# EAGLE board MAPE-CUN-Large-018 (EAGLE 6.3)
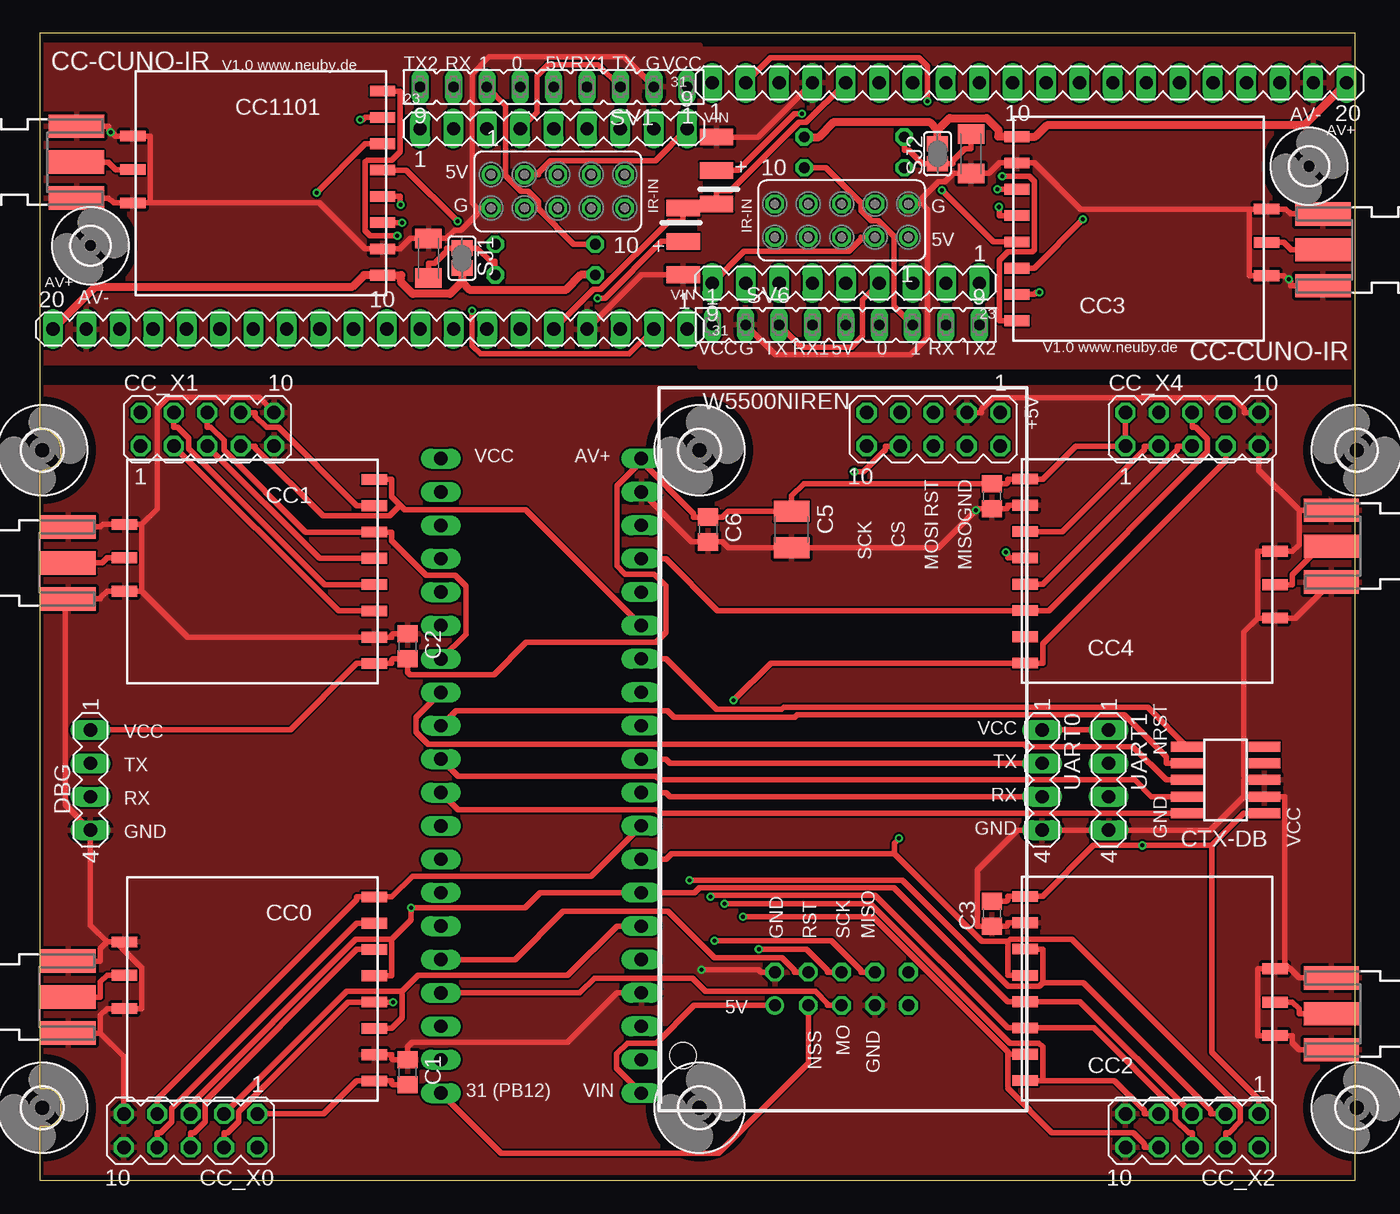
[diagram p0: board, top side]
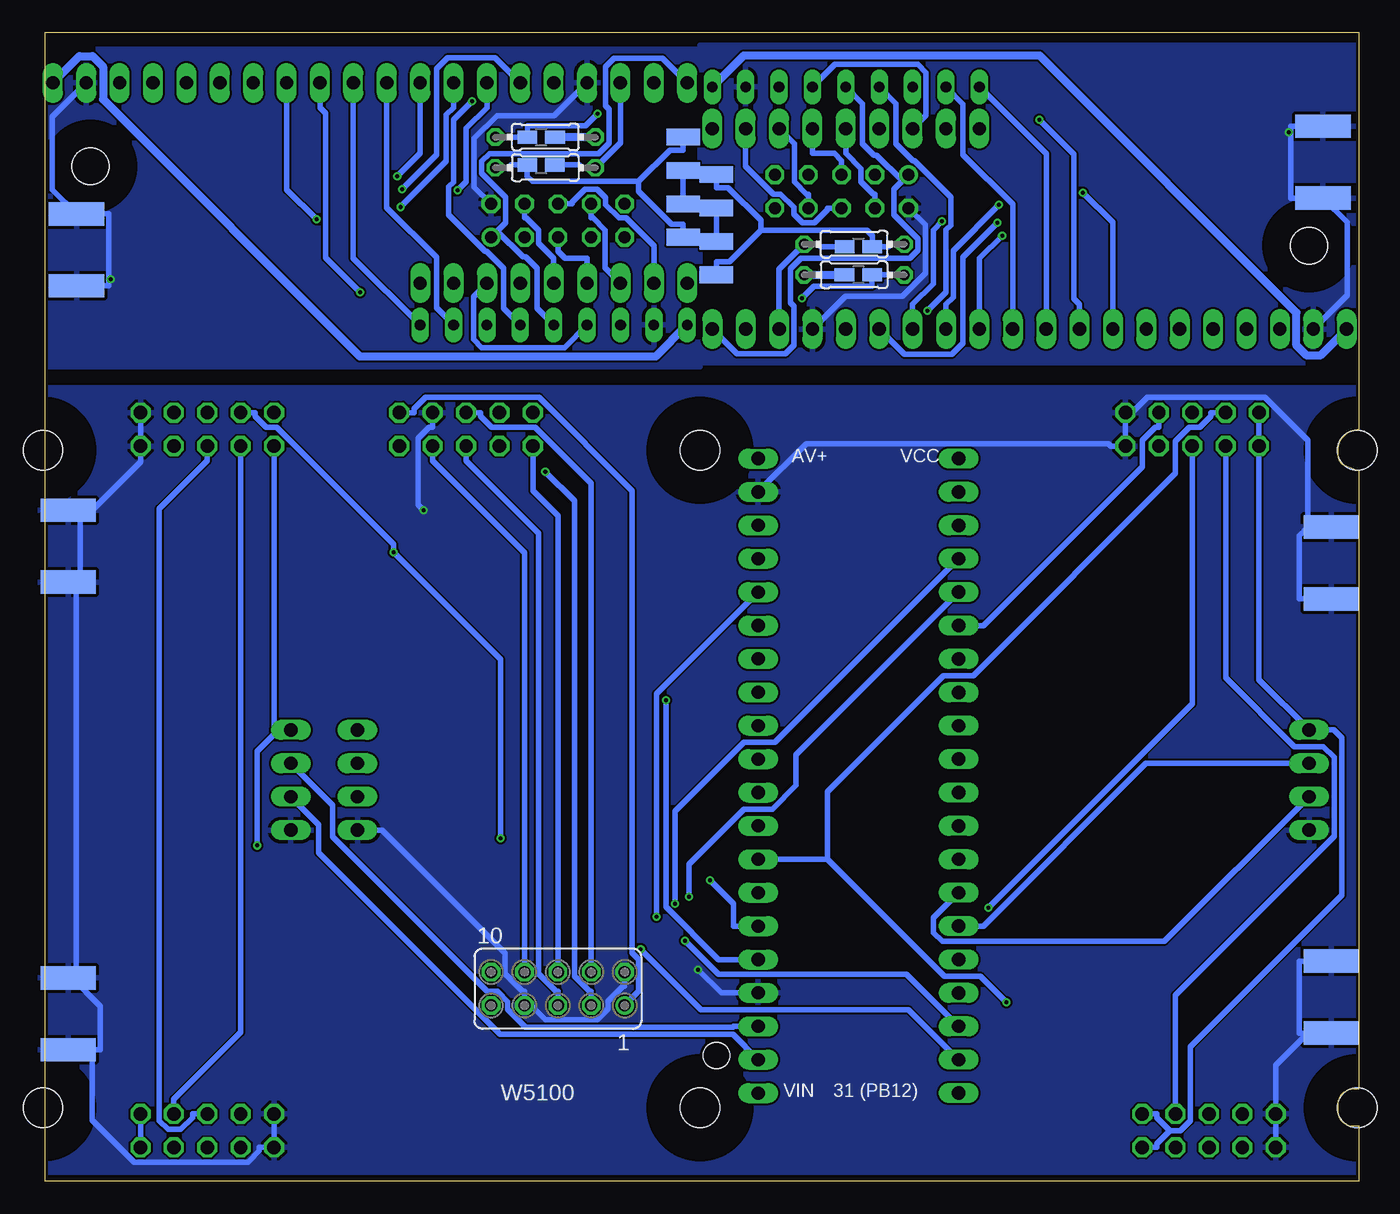
[diagram p1: board, bottom side, seen from below]

Size 100 x 87.3 mm. Coordinates in mm from the lower left corner, seen from the top.
Outline: 0,0 0,4.13 0.44,4.13 arc90 1.59,5.27 1.59,5.84 arc90 0.44,6.99 0,6.99 0,53.98 1.09,54.36 arc63 1.59,55.16 1.59,55.56 arc90 0,57.15 0,87.3 100,87.3 100,0 0,0
Copper layers (1*16): Top 0.035mm / dielectric 1.5mm / Bottom 0.035mm
Design rules "SeeedStudio_2layer_DRU_no_angle_20140221": minimum track width 6mil, minimum drill 12mil, track to track 6mil, track to pad 6mil, pad to pad 6mil, via to via 6mil, smd to smd 0mil, copper to edge 10mil, drill to drill 10mil, minimum pad ring 10mil, minimum via ring 6mil, stop-mask expansion 2mil, vias tented up to drill 100mil, thermal gap 10mil
Net classes: 0 default: width 0.406 mm; 1 PWR: width 0.305 mm
Holes 2 mm at 48.9,9.53

## Footprints (pad centres in the part's own frame; a part is rotated, then mirrored left to right if it is on the bottom)
C0805 = smd 1.3 x 1.5: 1 -0.95,0; 2 0.95,0
C1210 = smd 1.6 x 2.7: 1 -1.4,0; 2 1.4,0
C1206K = smd 1.5 x 2: 1 -1.5,0; 2 1.5,0
CC1101_MODULE1_SMD = smd 1.93 x 0.813: ANT 19,5.96; CSN 0,0; GDO0 0,2; GDO2 0,4; GND@0 0,12; GND@1 19,8.5; GND@2 19,3.42; MISO 0,6; MOSI 0,10; SCLK 0,8; VCC 0,14
MA05-2 = drill 1.016 octagon: 1 -5.08,-1.27; 2 -5.08,1.27; 3 -2.54,-1.27; 4 -2.54,1.27; 5 0,-1.27; 6 0,1.27; 7 2.54,-1.27; 8 2.54,1.27; 9 5.08,-1.27; 10 5.08,1.27
1365-10 = smd 0.76 x 2.4: 1 -2.54,-2.95; 2 -2.54,2.95; 3 -1.27,-2.95; 4 -1.27,2.95; 5 0,-2.95; 6 0,2.95; 7 1.27,-2.95; 8 1.27,2.95; 9 2.54,-2.95; 10 2.54,2.95
MA04-1 = drill 1.016 long: 1 -3.81,0; 2 -1.27,0; 3 1.27,0; 4 3.81,0
SMD1,27-2,54 = smd 1.27 x 2.54: 1 0,0
3,0 = hole 3: 0,0
2,8 = hole 2.8: 0,0
0204/7 = drill 0.813 octagon: 1 -3.81,0; 2 3.81,0
R0805W = smd 1.5 x 1: 1 -1.052,0; 2 1.052,0
SJ = smd 1.168 x 1.6: 1 -0.762,0; 2 0.762,0
FE09 = drill 0.813 long: 1 -10.16,0; 2 -7.62,0; 3 -5.08,0; 4 -2.54,0; 5 0,0; 6 2.54,0; 7 5.08,0; 8 7.62,0; 9 10.16,0
MA20-1 = drill 1.016 long: 1 -24.13,0; 2 -21.59,0; 3 -19.05,0; 4 -16.51,0; 5 -13.97,0; 6 -11.43,0; 7 -8.89,0; 8 -6.35,0; 9 -3.81,0; 10 -1.27,0; 11 1.27,0; 12 3.81,0; 13 6.35,0; 14 8.89,0; 15 11.43,0; 16 13.97,0; 17 16.51,0; 18 19.05,0; 19 21.59,0; 20 24.13,0
MA09-1 = drill 1.016 long: 1 -10.16,0; 2 -7.62,0; 3 -5.08,0; 4 -2.54,0; 5 0,0; 6 2.54,0; 7 5.08,0; 8 7.62,0; 9 10.16,0
20-DIP = drill 1.016 pad 1.27 long: 1 -24.13,-7.62; 2 -21.59,-7.62; 3 -19.05,-7.62; 4 -16.51,-7.62; 5 -13.97,-7.62; 6 -11.43,-7.62; 7 -8.89,-7.62; 8 -6.35,-7.62; 9 -3.81,-7.62; 10 -1.27,-7.62; 11 1.27,-7.62; 12 3.81,-7.62; 13 6.35,-7.62; 14 8.89,-7.62; 15 11.43,-7.62; 16 13.97,-7.62; 17 16.51,-7.62; 18 19.05,-7.62; 19 21.59,-7.62; 20 24.13,-7.62 | drill 1 pad 1.27 long: 21 24.13,7.62; 22 21.59,7.62; 23 19.05,7.62; 24 16.51,7.62; 25 13.97,7.62; 26 11.43,7.62; 27 8.89,7.62; 28 6.35,7.62; 29 3.81,7.62; 30 1.27,7.62; 31 -1.27,7.62; 32 -3.81,7.62; 33 -6.35,7.62; 34 -8.89,7.62; 35 -11.43,7.62; 36 -13.97,7.62; 37 -16.51,7.62; 38 -19.05,7.62; 39 -21.59,7.62; 40 -24.13,7.62
FE05-2 = drill 0.914: 1 -5.08,1.27 | drill 0.914 octagon: 2 -5.08,-1.27; 3 -2.54,1.27; 4 -2.54,-1.27; 5 0,1.27; 6 0,-1.27; 7 2.54,1.27; 8 2.54,-1.27; 9 5.08,1.27; 10 5.08,-1.27
SMA = smd 4.191 x 1.778: 1 2.115,0; GND@1 2.115,2.733; GND@2 2.115,-2.733 | smd 4.191 x 1.778 bottom: GND@3 2.115,2.733; GND@4 2.115,-2.733

## Placement (x,y rotation side)
C1  22pF  [C0805]  27.94,8.26 270 top
C2  22pF  [C0805]  27.94,40.64 270 top
C3  22pF  [C0805]  72.39,20.32 90 top
C4  22pF  [C0805]  72.39,52.07 90 top
C5  10uF  [C1210]  57.15,49.53 270 top
C6  22pF  [C0805]  50.8,49.53 270 top
C7  4,7uF  [C1206K]  29.53,70.17 90 top
C8  4,7uF  [C1206K]  70.8,78.11 270 top
CC0  CC1101_MODULE1SMD  [CC1101_MODULE1_SMD]  25.4,21.59 180 top
CC1  CC1101_MODULE1SMD  [CC1101_MODULE1_SMD]  25.4,53.34 180 top
CC2  CC1101_MODULE1SMD  [CC1101_MODULE1_SMD]  74.93,7.62 0 top
CC3  CC1101_MODULE1SMD  [CC1101_MODULE1_SMD]  74.3,65.41 0 top
CC4  CC1101_MODULE1SMD  [CC1101_MODULE1_SMD]  74.93,39.37 0 top
CC1101  CC1101_MODULE1SMD  [CC1101_MODULE1_SMD]  26.04,82.87 180 top
CC_X0  [MA05-2]  11.43,3.81 180 top
CC_X1  [MA05-2]  12.7,57.15 0 top
CC_X2  [MA05-2]  87.63,3.81 180 top
CC_X4  [MA05-2]  87.63,57.15 0 top
CTX-DB  1365-10  [1365-10]  90.17,30.48 90 top
DBG  [MA04-1]  3.81,30.48 270 top
GND  [SMD1,27-2,54]  48.9,68.9 90 top
GND1  [SMD1,27-2,54]  51.44,79.38 270 top
H1  MOUNT-HOLE3.0  [3,0]  100.14,5.55 0 top
H2  MOUNT-HOLE3.0  [3,0]  100.14,55.55 90 top
H3  MOUNT-HOLE3.0  [3,0]  0.14,5.55 0 top
H4  MOUNT-HOLE3.0  [3,0]  0.14,55.55 0 top
H5  MOUNT-HOLE3.0  [3,0]  50.14,5.55 0 top
H6  MOUNT-HOLE3.0  [3,0]  50.14,55.55 0 top
H7  MOUNT-HOLE2.8  [2,8]  3.81,71.12 0 top
H8  MOUNT-HOLE2.8  [2,8]  96.52,77.15 180 top
IR+  [SMD1,27-2,54]  48.9,71.44 90 top
IR+1  [SMD1,27-2,54]  51.44,76.83 270 top
IR-IN  [SMD1,27-2,54]  48.9,73.98 90 top
IR-IN1  [SMD1,27-2,54]  51.44,74.3 270 top
PC+  [SMD1,27-2,54]  48.9,76.52 90 bottom
PC+1  [SMD1,27-2,54]  51.44,71.75 270 bottom
PC-  [SMD1,27-2,54]  48.9,73.98 90 bottom
PC-1  [SMD1,27-2,54]  51.44,74.3 270 bottom
PWR+  [SMD1,27-2,54]  48.9,68.9 90 bottom
PWR+1  [SMD1,27-2,54]  51.44,79.38 270 bottom
PWR-  [SMD1,27-2,54]  48.9,71.44 90 bottom
PWR-1  [SMD1,27-2,54]  51.44,76.83 270 bottom
R1  100  [0204/7]  61.91,79.38 0 bottom
R2  100  [0204/7]  38.42,68.9 180 bottom
R3  100  [R0805W]  38.1,68.9 180 bottom
R4  100  [R0805W]  62.23,79.38 0 bottom
R5  220  [0204/7]  38.41,71.23 0 bottom
R6  220  [0204/7]  61.92,77.04 180 bottom
R7  220  [R0805W]  38.09,71.02 0 bottom
R8  220  [R0805W]  62.24,77.25 180 bottom
SJ1  [SJ]  32.07,70.17 270 top
SJ2  [SJ]  68.26,78.11 90 top
SV1  [FE09]  39.05,83.19 180 top
SV2  [MA20-1]  75.25,83.5 0 top
SV3  [MA09-1]  61.28,68.26 180 top
SV4  [MA20-1]  25.08,64.77 180 top
SV5  [MA09-1]  39.05,80.01 0 top
SV6  [FE09]  61.28,65.09 0 top
U$1  MAPLEMINI  [20-DIP]  38.1,30.8 270 top
UART0  [MA04-1]  76.2,30.48 270 top
UART1  [MA04-1]  81.28,30.48 270 top
W1  [FE05-2]  39.37,75.25 0 top
W2  [FE05-2]  60.96,73.03 180 top
W5100  [FE05-2]  60.96,14.61 180 bottom
W5500NIREN  [MA05-2]  67.94,57.15 180 top
X1  SMA  [SMA]  0,46.99 0 top
X2  SMA  [SMA]  0,13.97 0 top
X3  SMA  [SMA]  100.33,12.7 180 top
X4  SMA  [SMA]  100.33,48.26 180 top
X5  SMA  [SMA]  0.64,77.47 0 top
X6  SMA  [SMA]  99.69,70.8 180 top

## Library data of the parts
C1-C8 R1-R8 = rcl
CC0 CC1-CC4 CC1101 = wireless
CC_X0 CC_X1 CC_X2 CC_X4 DBG SV2-SV5 UART0 UART1 W5500NIREN = con-lstb; OC_FARNELL: unknown; OC_NEWARK: unknown
CTX-DB = con-leotronics; OC_FARNELL: unknown; OC_NEWARK: unknown
GND GND1 IR+ IR+1 IR-IN IR-IN1 PC+ PC+1 PC- PC-1 PWR+ PWR+1 PWR- PWR-1 = wirepad
H1-H8 = holes
SJ1 SJ2 = jumper
SV1 SV6 W1 W2 W5100 = con-lsta; OC_FARNELL: unknown; OC_NEWARK: unknown
U$1 = maplemini-small
X1-X6 = sma

## Nets
0-PB1: SV2.2 SV6.6
0-PB11: SV1.6 SV4.2
1: SV2.17
1-PB1: R6.1 R8.1 SV2.3 SV6.7
1-PB10: R5.1 R7.1 SV1.7 SV4.3
2: SV2.16
3: SV2.15
3-PB0: IR-IN.1 SV4.5
3-PB1: IR-IN1.1 SV2.5
12: SV4.15
13: SV4.16
14: SV4.17
+5V: U$1.21 W5100.1 W5500NIREN.1
+5V1: SV1.5 SV4.1 W1.1
+5V2: SV2.1 SV6.5 W2.1
CC_CS0: CC0.CSN CC_X0.7 U$1.29
CC_CS1: CC1.CSN CC_X1.7 U$1.35
CC_CS2: CC2.CSN CC_X2.7 U$1.4
CC_CS3: CC4.CSN CC_X4.7 U$1.25
CC_IN0: U$1.33
CC_IN_0: CC0.GDO2 CC_X0.6
CC_IN_1: CC1.GDO2 CC_X1.6 U$1.7
CC_IN_2: CC2.GDO2 CC_X2.6 U$1.5
CC_IN_3: CC4.GDO2 CC_X4.6 U$1.37
CC_IN_4: CC1101.GDO2 SV4.13
CC_IN_5: CC3.GDO2 SV2.13
CC_OUT0: U$1.32
CC_OUT_0: CC0.GDO0 CC_X0.8
CC_OUT_1: CC1.GDO0 CC_X1.8 U$1.6
CC_OUT_2: CC2.GDO0 CC_X2.8 U$1.36
CC_OUT_3: CC1101.GDO0 SV4.12
CC_OUT_4: CC3.GDO0 SV2.12
CSN: CC1101.CSN SV4.9
CSN1: CC3.CSN SV2.9
GND: C1.1 C2.1 C3.1 C4.1 C5.2 C6.2 CC0.GND@0 CC0.GND@1 CC0.GND@2 CC1.GND@0 CC1.GND@1 CC1.GND@2 CC2.GND@0 CC2.GND@1 CC2.GND@2 CC4.GND@0 CC4.GND@1 CC4.GND@2 CC_X0.9 CC_X0.10 CC_X1.9 CC_X1.10 CC_X2.9 CC_X2.10 CC_X4.9 CC_X4.10 CTX-DB.3 CTX-DB.5 DBG.4 U$1.24 U$1.39 UART0.4 UART1.4 W5100.2 W5100.7 W5500NIREN.3 X1.GND@1 X1.GND@2 X1.GND@3 X1.GND@4 X2.GND@1 X2.GND@2 X2.GND@3 X2.GND@4 X3.GND@1 X3.GND@2 X3.GND@3 X3.GND@4 X4.GND@1 X4.GND@2 X4.GND@3 X4.GND@4
GND1: C7.2 CC1101.GND@0 CC1101.GND@1 CC1101.GND@2 GND.1 SV1.2 SV4.4 SV4.19 W1.2 X5.GND@1 X5.GND@2 X5.GND@3 X5.GND@4
GND2: C8.2 CC3.GND@0 CC3.GND@1 CC3.GND@2 GND1.1 SV2.4 SV2.19 SV6.2 W2.2 X6.GND@1 X6.GND@2 X6.GND@3 X6.GND@4
IR+: C7.1 IR+.1 R2.1 R3.1 SJ1.1
IR+1: C8.1 IR+1.1 R1.1 R4.1 SJ2.1
MISO1: CC0.MISO CC1.MISO CC2.MISO CC4.MISO CC_X0.5 CC_X1.5 CC_X2.5 CC_X4.5 U$1.27
MISO2: U$1.18 W5100.8 W5500NIREN.4
MISO3: SV5.7 W1.8
MISO4: SV3.7 W2.8
MOSI: CC1101.MOSI SV4.6
MOSI1: CC0.MOSI CC1.MOSI CC2.MOSI CC4.MOSI CC_X0.3 CC_X1.3 CC_X2.3 CC_X4.3 U$1.26
MOSI2: SV5.6 W1.5
MOSI3: CC3.MOSI SV2.6
MOSI4: SV3.6 W2.5
N$1: CC2.ANT X3.1
N$2: CC4.ANT X4.1
N$3: CC1.ANT X1.1
N$4: CC0.ANT X2.1
N$5: CC1101.ANT X5.1
N$6: CC1101.MISO SV4.7
N$7: CC1101.SCLK SV4.8
N$8: CTX-DB.7
N$9: CC3.ANT X6.1
N$10: CC3.MISO SV2.7
N$11: CC3.SCLK SV2.8
NC: CTX-DB.9
NRESET: CTX-DB.10 U$1.34
PWR+: PC+.1 PWR+.1 R5.2 R7.2
PWR+1: PC+1.1 PWR+1.1 R6.2 R8.2
PWR-: PC-.1 PWR-.1
PWR-1: PC-1.1 PWR-1.1
RST: U$1.17 W5100.5 W5500NIREN.6
RX0: U$1.30 UART0.3
RX1: U$1.22 UART1.3
RX2: SV1.4 SV5.3
RX3: SV3.3 SV6.4
RX_DBG: DBG.3 U$1.14
S2RX: SV1.8 SV4.10
S2RX1: SV2.10 SV6.8
S2TX: SV1.9 SV4.11
S2TX1: SV2.11 SV6.9
SCK1: CC0.SCLK CC1.SCLK CC2.SCLK CC4.SCLK CC_X0.4 CC_X1.4 CC_X2.4 CC_X4.4 U$1.28
SCK2: U$1.19 W5100.6 W5500NIREN.10
SCK3: SV5.8 W1.6
SCK4: SV3.8 W2.6
SWCLK/TCK: CTX-DB.4 U$1.10
SWDIO/TMS: CTX-DB.2 U$1.11
SWO/TDO: CTX-DB.6 U$1.8
TDI: CTX-DB.8 U$1.9
TX0: U$1.31 UART0.2
TX1: U$1.23 UART1.2
TX2: SV1.3 SV5.4
TX3: SV3.4 SV6.3
TX_DBG: DBG.2 U$1.15
USB-DM: SV5.1
USB-DM1: SV3.1
USB-DP: SV5.2
USB-DP1: SV3.2
VCC: C1.2 C2.2 C3.2 C4.2 C5.1 C6.1 CC0.VCC CC1.VCC CC2.VCC CC4.VCC CC_X0.1 CC_X0.2 CC_X1.1 CC_X1.2 CC_X2.1 CC_X2.2 CC_X4.1 CC_X4.2 CTX-DB.1 DBG.1 U$1.40 UART0.1 UART1.1
VCC1 [PWR]: CC1101.VCC R2.2 R3.2 SJ1.2 SV1.1 SV4.20
VCC2 [PWR]: CC3.VCC R1.2 R4.2 SJ2.2 SV2.20 SV6.1
WIZ_CS: U$1.20 W5100.3 W5500NIREN.8
WIZ_CS1: SV5.9 W1.3
WIZ_CS2: SV3.9 W2.3
WIZ_RST: U$1.16 W5100.4 W5500NIREN.5
WIZ_RST1: SV5.5 W1.4
WIZ_RST2: SV3.5 W2.4

## Tracks (layer width: path | path; a pad name or v marks a point on that pad's centre or on a via)
0-PB1  (via drill 0.3 pad 0.61)
  Top 0.406: SV2.2 55.55,85.39 66.85,85.39 67.47,84.76 v67.47,82.1
  Bottom 0.406: SV6.6 65.09,66.36 65.09,69.4 66.37,70.69 66.49,70.69 69.26,73.46 69.26,75.59 68.9,75.95 68.9,80.68 v67.47,82.1
0-PB11  (via drill 0.3 pad 0.61)
  Top 0.406: SV4.2 44.78,62.88 33.48,62.88 32.85,63.51 v32.85,66.17
  Bottom 0.406: SV1.6 35.24,81.92 35.24,78.87 33.96,77.58 33.84,77.58 31.07,74.81 31.07,72.69 31.43,72.33 31.43,67.59 v32.85,66.17
1-PB1
  Top 0.406: R6.1 59.75,77.04 62.43,74.36 62.43,73.82 63.23,73.03 63.75,73.03 64.94,71.84 64.94,66.51 SV6.7
  Bottom 0.406: R8.1 59.33,77.25 59.12,77.04 R6.1 56.2,78.95 SV2.3
1-PB10
  Top 0.406: R5.1 40.58,71.23 37.9,73.91 37.9,74.45 37.1,75.25 36.58,75.25 35.4,76.43 35.4,81.76 SV1.7
  Bottom 0.406: R7.1 41,71.02 41.21,71.23 R5.1 44.13,69.32 SV4.3
3-PB0
  Top 0.406: SV4.5 42.07,67.78 42.63,67.78 47.83,72.99 48.9,72.99 IR-IN.1
3-PB1
  Top 0.406: SV2.5 58.26,80.49 57.7,80.49 52.5,75.29 51.44,75.29 IR-IN1.1
+5V
  Top 0.406: W5100.1 49.72,13.34 46.86,10.48 44.65,10.48 43.83,9.65 43.83,8.56 U$1.21
  Bottom 0.406: W5100.1 54.81,14.4 54.81,16.83 55.31,17.33 55.31,52.49 62.4,59.58 71.03,59.58 71.91,58.7 71.91,58.42 W5500NIREN.1
+5V1
  Bottom 0.406: SV4.1 47.33,62.89 43.65,62.89 43,63.53 43,66.52 43.25,66.77 43.25,69.37 42.46,70.15 34.18,70.15 33.58,70.75 33.58,71.64 35.39,73.46 35.39,75.42 34.75,76.05 | W1.1 34.75,76.05 | 34.75,76.05 36.7,78.01 36.92,78.01 37.78,78.87 37.78,81.92 SV1.5
+5V2
  Bottom 0.406: SV2.1 53,85.38 56.68,85.38 57.33,84.74 57.33,81.75 57.08,81.5 57.08,78.91 57.87,78.12 66.15,78.12 66.75,77.52 66.75,76.63 64.94,74.82 64.94,72.86 65.58,72.22 | W2.1 65.58,72.22 | 65.58,72.22 63.62,70.27 63.41,70.27 62.55,69.4 62.55,66.36 SV6.5
CC_CS0
  Top 0.406: U$1.29 41.91,23.18 28.31,23.18 26.72,21.59 CC0.CSN 24.08,21.59 24.08,21.39 8.89,6.2 CC_X0.7
CC_CS1
  Top 0.406: 27.37,51.37 27.72,51.02 36.93,51.02 U$1.35 | 27.37,51.37 26.57,50.58 21.5,50.58 16.36,55.72 16.36,55.88 CC_X1.7 | 27.37,51.37 26.72,52.02 26.72,53.34 CC1.CSN
CC_CS2  (via drill 0.3 pad 0.61)
  Top 0.406: CC_X2.7 83.97,5.08 83.97,5.36 81.71,7.62 76.25,7.62 | CC2.CSN 76.25,7.62 | v52.05,21.07 63.15,21.07 73.75,10.46 75.97,10.46 76.25,10.18 76.25,7.62
  Bottom 0.406: U$1.4 44.45,33.34 46.8,33.34 52.05,28.09 v52.05,21.07
CC_CS3  (via drill 0.3 pad 0.61)
  Top 0.406: v52.74,36.53 55.58,39.37 CC4.CSN 76.25,39.37 76.25,40.84 90.17,54.76 CC_X4.7
  Bottom 0.406: U$1.25 48.74,16.83 52.74,20.83 v52.74,36.53
CC_IN_0
  Top 0.406: CC0.GDO2 24.08,17.59 12.55,6.06 12.55,4.5 11.71,3.66 11.43,3.66 CC_X0.6
CC_IN_1
  Top 0.406: U$1.7 32.37,41.58 32.37,45.23 31.56,46.04 29.36,46.04 26.72,48.67 26.72,49.34 CC1.GDO2 20.2,49.34 13.97,55.57 13.97,56.31 12.97,57.3 12.7,57.3 CC_X1.6
CC_IN_2  (via drill 0.3 pad 0.61)
  Top 0.406: v50.98,21.61 51.09,21.73 63.5,21.73 73.61,11.62 CC2.GDO2 80.13,11.62 86.36,5.39 86.36,4.65 87.36,3.66 87.63,3.66 CC_X2.6
  Bottom 0.406: U$1.5 42.83,32.41 42.83,30.07 44.65,28.26 46.78,28.26 50.98,24.06 v50.98,21.61
CC_IN_3
  Top 0.406: U$1.37 47.58,47.31 51.52,43.37 73.61,43.37 CC4.GDO2 76.71,43.37 88.76,55.42 88.76,56.44 87.9,57.3 87.63,57.3 CC_X4.6
CC_IN_4  (via drill 0.3 pad 0.61)
  Top 0.406: v21,75.16 24.71,78.87 CC1101.GDO2
  Bottom 0.406: SV4.13 18.73,72.89 v21,75.16
CC_IN_5  (via drill 0.3 pad 0.61)
  Top 0.406: v79.33,73.12 75.62,69.41 CC3.GDO2
  Bottom 0.406: SV2.13 81.6,75.39 v79.33,73.12
CC_OUT_0
  Top 0.406: CC0.GDO0 24.08,19.59 10.01,5.52 10.01,4.5 9.17,3.66 8.89,3.66 CC_X0.8
CC_OUT_1
  Top 0.406: CC_X1.8 16.36,58.42 16.36,58.15 17.2,57.3 18.12,57.3 24.08,51.34 CC1.GDO0
  Bottom 0.406: CC_X1.8 15.24,57.3 15.51,57.3 16.51,56.31 16.51,54.32 28.6,42.23 U$1.6
CC_OUT_2  (via drill 0.3 pad 0.61)
  Top 0.406: 73.61,9.62 73.61,9.81 63.33,20.1 v53.45,20.1 | CC2.GDO0 73.61,9.62 | 73.61,9.62 73.61,7.02 76.97,3.66 83.13,3.66 83.97,2.82 83.97,2.54 CC_X2.8
  Bottom 0.406: U$1.36 53.45,37.04 v53.45,20.1
CC_OUT_3  (via drill 0.3 pad 0.61)
  Top 0.406: CC1101.GDO0 24.71,80.87 24.55,80.71 v24.34,80.71
  Bottom 0.406: SV4.12 21.27,66.65 21.71,67.08 21.71,78.08 v24.34,80.71
CC_OUT_4  (via drill 0.3 pad 0.61)
  Top 0.406: CC3.GDO0 75.62,67.41 75.78,67.57 v75.99,67.57
  Bottom 0.406: SV2.12 79.06,81.62 78.62,81.19 78.62,70.19 v75.99,67.57
CSN  (via drill 0.3 pad 0.61)
  Top 0.406: CC1101.CSN 27.36,82.87 27.36,78.28 26.71,77.63 24.86,77.63 24.71,77.48 24.71,72.26 25.1,71.88 v27.16,71.88
  Bottom 0.406: v27.16,71.88 28.89,70.15 SV4.9
CSN1  (via drill 0.3 pad 0.61)
  Top 0.406: CC3.CSN 72.97,65.41 72.97,70 73.62,70.64 75.47,70.64 75.62,70.79 75.62,76.01 75.23,76.39 v73.17,76.39
  Bottom 0.406: v73.17,76.39 71.44,78.13 SV2.9
GND  (via drill 0.3 pad 0.61)
  Top 0.406: 28.27,10.54 40.11,10.54 43.86,14.29 U$1.24 | 28.27,10.54 | 28.27,10.54 27.94,10.21 C1.1 26.83,9.21 26.72,9.32 26.72,9.59 CC0.GND@0 | W5100.2 54.81,15.88 54.64,16.05 v50.29,16.05 | 7.72,49.92 7.72,44.84 | 7.72,49.92 CC1.GND@2 4.76,49.92 4.57,49.72 X1.GND@3 | CC_X1.10 16.63,59.57 9.72,59.57 8.89,58.74 8.89,51.09 7.72,49.92 | 95.08,16.12 95.76,15.43 X3.GND@4 | 95.08,16.12 94.68,16.52 94.68,29.21 CTX-DB.3 91.56,29.21 | 95.08,16.12 CC2.GND@1 92.61,16.12 92.61,11.04 CC2.GND@2 95.25,11.04 95.25,10.48 95.76,9.97 X3.GND@3 | 91.56,29.21 89.02,26.67 83.16,26.67 UART1.4 UART0.4 74.32,26.67 71.28,23.63 71.28,19.37 C3.1 73.5,19.37 73.61,19.48 73.61,19.62 CC2.GND@0 | 91.56,29.21 91.56,30.48 91.89,30.48 | W5500NIREN.3 71.6,58.42 71.6,58.69 72.46,59.55 90.74,59.55 91.59,58.7 91.59,58.42 CC_X4.10 | CTX-DB.5 91.89,30.48 | 92.61,42.79 91.56,41.74 91.56,30.8 91.89,30.48 | 92.61,42.79 92.75,42.79 CC4.GND@2 95.48,42.79 X4.GND@3 | 7.72,44.84 7.06,44.84 CC1.GND@1 5.08,44.84 4.57,44.33 4.57,44.26 X1.GND@4 1.89,44.03 1.89,28.59 DBG.4 3.81,19.44 5.08,18.17 | 7.72,44.84 | 7.72,44.84 11.22,41.34 CC1.GND@0 26.72,41.34 26.72,41.48 26.83,41.59 C2.1 | U$1.39 49.53,48.58 C6.2 51.91,48.58 52.36,48.13 C5.2 68.32,48.13 v71.17,50.98 71.28,51.09 71.28,51.12 C4.1 73.5,51.12 73.61,51.23 73.61,51.37 CC4.GND@0 | 5.74,18.17 7.72,16.19 7.72,13.09 CC0.GND@1 5.08,13.09 4.57,12.58 4.57,11.24 | 5.74,18.17 5.08,18.17 | CC0.GND@2 5.74,18.17 | 92.61,42.79 92.61,47.87 CC4.GND@1 95.25,47.87 95.76,48.38 95.76,50.99 | CC_X0.9 6.35,9.45 4.57,11.24 | CC_X4.9 92.71,54.05 95.76,50.99 | X2.GND@3 4.57,16.7 4.57,17.66 5.08,18.17
  Top 0.406: X2.GND@4 4.57,11.24 | X4.GND@4 95.76,50.99
  Bottom 0.406: v50.29,16.05 48.53,14.29 U$1.24 | W5100.2 55.88,14.81 56.01,14.81 57.15,13.67 57.15,13.07 57.97,12.25 61.88,12.25 63.5,13.87 | 63.5,13.87 63.5,14.4 63.63,14.4 64.97,15.74 64.97,17.32 74.32,26.67 UART0.4 | W5100.7 63.5,13.87 | 3.92,49.72 3.92,56.33 7.18,59.59 16.11,59.59 17.29,58.42 | 3.92,49.72 4.57,49.07 4.57,44.26 X1.GND@4 | 3.92,49.72 3.04,49.72 X1.GND@3 | 96.39,9.97 96.39,4.6 93.21,1.42 84.52,1.42 83.67,2.27 83.67,2.54 CC_X2.10 CC_X2.9 | 96.39,9.97 95.76,9.97 95.76,13.29 97.91,15.43 | X3.GND@3 96.39,9.97 | 97.91,15.43 97.6,15.43 97.6,44.91 96.99,45.53 97.3,45.53 | X3.GND@4 97.91,15.43 | X4.GND@3 97.3,45.53 | 97.3,50.99 96.39,50.99 92.71,54.67 CC_X4.9 CC_X4.10 | X4.GND@4 97.3,50.99 | 97.3,50.99 97.3,45.53 | 17.29,58.42 17.78,57.92 CC_X1.9 18.9,55.88 19.08,56.06 42.05,56.06 U$1.39 | CC_X1.10 17.29,58.42 | 3.92,11.24 6.35,8.8 CC_X0.9 CC_X0.10 | 3.92,11.24 4.57,11.24 4.57,16.7 X2.GND@3 | X2.GND@4 3.92,11.24 | W5500NIREN.3 70.48,57.3 70.76,57.3 71.6,56.46 71.6,51.41 v71.17,50.98
  pour Bottom: 0,60.33 0,0.64 100.33,0.64 100.33,60.33
  pour Top: 0,0.64 0,60.33 100.33,60.33 100.33,0.64
GND1  (via drill 0.3 pad 0.61)
  Top 0.406: SV4.4 45.72,68.9 GND.1 | 33.22,73.98 32.83,74.37 32.83,84.15 34.15,85.47 44.39,85.47 SV1.2 | 33.22,73.98 33.22,73.52 32.01,72.3 31.52,72.3 30.88,71.67 C7.2 28.17,71.67 27.37,70.87 CC1101.GND@0 24.71,70.87 21.21,74.37 8.36,74.37 | 33.22,73.98 | W1.2 33.22,73.98 | X5.GND@1 5.2,80.2 5.2,79.86 v5.34,79.73 5.43,79.73 5.71,79.45 CC1101.GND@2 8.36,79.45 8.36,74.37 | 8.36,74.37 7.7,74.37 CC1101.GND@1 5.57,74.37 5.2,74.74 X5.GND@2
  Bottom 0.406: W1.2 33.01,72.7 33.01,69 34.75,67.26 39.1,67.26 SV4.4 | 5.2,79.73 5.2,80.2 X5.GND@1 | 5.2,79.73 5.2,74.74 X5.GND@2 0.9,72.89 0.9,67.36 SV4.19 | 5.2,79.73 v5.34,79.73
  pour Top: 0,86.36 0,62.23 50.16,62.23 50.16,86.36
  pour Bottom: 0,62.23 0,86.36 50.16,86.36 50.16,62.23
GND2  (via drill 0.3 pad 0.61)
  Top 0.406: SV2.4 54.61,79.38 GND1.1 | 67.11,74.3 67.5,73.9 67.5,64.12 66.18,62.81 55.94,62.81 SV6.2 | 67.11,74.3 67.11,74.76 68.32,75.97 68.81,75.97 69.45,76.61 C8.2 72.16,76.61 72.96,77.41 CC3.GND@0 75.62,77.41 79.12,73.91 91.97,73.91 | 67.11,74.3 | W2.2 67.11,74.3 | X6.GND@1 95.13,68.07 95.13,68.41 v94.99,68.55 94.89,68.55 94.62,68.83 CC3.GND@2 91.97,68.83 91.97,73.91 | 91.97,73.91 92.64,73.91 CC3.GND@1 94.76,73.91 95.13,73.53 X6.GND@2
  Bottom 0.406: W2.2 67.32,75.57 67.32,79.27 65.58,81.01 61.23,81.01 SV2.4 | 95.13,68.55 95.13,68.07 X6.GND@1 | 95.13,68.55 95.13,73.53 X6.GND@2 99.43,75.39 99.43,80.91 SV2.19 | 95.13,68.55 v94.99,68.55
  pour Top: 100.33,61.91 100.33,86.04 50.16,86.04 50.16,61.91
  pour Bottom: 100.33,86.04 100.33,61.91 50.16,61.91 50.16,86.04
IR+  (via drill 0.3 pad 0.61)
  Top 0.406: v42.41,67.12 42.96,67.12 47.27,71.44 IR+.1 | C7.1 29.53,69.77 29.98,69.77 30.91,70.71 30.91,70.93 SJ1.1 32.65,70.93 33.22,70.93 34.24,69.91 34.61,69.91 R2.1
  Bottom 0.406: v42.41,67.12 41.49,68.04 37.05,68.04 R3.1 36.49,68.9 35.94,68.9 R2.1
IR+1  (via drill 0.3 pad 0.61)
  Top 0.406: v57.92,81.15 57.37,81.15 53.06,76.83 IR+1.1 | C8.1 70.8,78.5 70.36,78.5 69.42,77.56 69.42,77.34 SJ2.1 67.69,77.34 67.11,77.34 66.09,78.36 65.72,78.36 R1.1
  Bottom 0.406: v57.92,81.15 58.84,80.23 63.28,80.23 R4.1 63.84,79.38 64.39,79.38 R1.1
MISO1  (via drill 0.3 pad 0.61)
  Top 0.406: 26.72,18.35 28.2,19.83 v28.2,20.77 36.86,20.77 38,21.91 U$1.27 47.58,21.91 49.76,21.91 50.14,22.29 64.94,22.29 73.61,13.62 CC2.MISO 79.09,13.62 CC_X2.5 | CC_X0.5 11.43,5.79 24,18.35 26.72,18.35 | 26.72,18.35 26.72,15.59 CC0.MISO | CC_X1.5 21.24,47.34 CC1.MISO | CC_X4.5 86.51,55.88 86.51,55.61 76.28,45.37 CC4.MISO
  Bottom 0.406: CC_X1.5 12.7,36.27 v28.2,20.77 | CC_X2.5 88.75,5.08 88.75,4.81 89.65,3.9 90.62,3.9 91.29,4.57 91.29,51.1 87.63,54.76 CC_X4.5
MISO2  (via drill 0.3 pad 0.61)
  Top 0.406: v51.28,18.26 60.18,18.26 62.43,16.01 62.43,15.88 W5100.8
  Bottom 0.406: U$1.18 34.45,15.72 48.73,15.72 v51.28,18.26 | W5100.8 63.5,47.78 70.48,54.76 W5500NIREN.4
MISO3
  Bottom 0.406: W1.8 41.91,75.04 42.04,75.04 42.98,75.98 42.98,78.85 SV5.7
MISO4
  Bottom 0.406: W2.8 58.42,73.23 58.29,73.23 57.35,72.3 57.35,69.42 SV3.7
MOSI  (via drill 0.3 pad 0.61)
  Top 0.406: v27.53,72.87 CC1101.MOSI
  Bottom 0.406: SV4.6 34.61,62.87 30.99,62.87 30.16,63.69 30.16,70.23 v27.53,72.87
MOSI1  (via drill 0.3 pad 0.61)
  Top 0.406: CC_X4.3 83.97,55.88 83.97,55.6 77.74,49.37 CC4.MOSI | U$1.26 43.86,19.37 40.11,15.62 28.75,15.62 27.52,14.4 | 76.25,15.05 76.01,14.8 73.64,14.8 65.59,22.84 v49.37,22.84 | 76.25,15.05 79.36,15.05 89.05,5.35 89.05,5.08 CC_X2.3 | 76.25,15.05 76.25,17.62 CC2.MOSI | CC0.MOSI 26.72,11.59 27.52,12.39 27.52,14.4 | CC_X1.3 22.7,43.34 CC1.MOSI | CC_X0.3 23.29,14.4 27.52,14.4
  Bottom 0.406: v49.37,22.84 47.58,21.06 47.58,19.37 U$1.26 | CC_X0.3 13.97,14.11 1.9,26.18 1.9,32.2 2.71,33.02 4.92,33.02 10.16,38.27 CC_X1.3 | CC_X2.3 90.17,6.2 85.09,11.28 CC_X4.3
MOSI2
  Bottom 0.406: SV5.6 41.59,78.13 39.92,78.13 39.37,77.58 W1.5
MOSI3  (via drill 0.3 pad 0.61)
  Top 0.406: v72.8,75.41 CC3.MOSI
  Bottom 0.406: SV2.6 65.72,85.41 69.34,85.41 70.17,84.58 70.17,78.04 v72.8,75.41
MOSI4
  Bottom 0.406: SV3.6 58.74,70.14 60.41,70.14 60.96,70.69 W2.5
N$1
  Top 0.406: X3.1 95.76,12.7 95.76,13.07 95.25,13.58 CC2.ANT
N$2
  Top 0.406: CC4.ANT 95.25,45.33 95.25,46.09 97.42,48.26 X4.1
N$3
  Top 0.406: CC1.ANT 5.08,47.38 4.69,46.99 X1.1
N$4
  Top 0.406: X2.1 4.57,13.97 4.57,15.12 5.08,15.63 CC0.ANT
N$5
  Top 0.406: X5.1 5.2,77.47 5.2,77.42 5.71,76.91 CC1101.ANT
N$6  (via drill 0.3 pad 0.61)
  Top 0.406: v31.73,72.96 27.82,76.87 CC1101.MISO
  Bottom 0.406: SV4.7 33.97,66.65 32.39,68.23 32.39,72.3 v31.73,72.96
N$7  (via drill 0.3 pad 0.61)
  Top 0.406: v27.4,74.22 27.36,74.26 27.36,74.87 CC1101.SCLK
  Bottom 0.406: SV4.8 31.43,66.65 30.87,67.21 30.87,70.74 v27.4,74.22
N$9
  Top 0.406: X6.1 95.13,70.8 95.13,70.85 94.62,71.36 CC3.ANT
N$10  (via drill 0.3 pad 0.61)
  Top 0.406: v68.6,75.31 72.51,71.41 CC3.MISO
  Bottom 0.406: SV2.7 66.36,81.62 67.94,80.04 67.94,75.97 v68.6,75.31
N$11  (via drill 0.3 pad 0.61)
  Top 0.406: v72.93,74.06 72.97,74.01 72.97,73.41 CC3.SCLK
  Bottom 0.406: SV2.8 68.9,81.62 69.46,81.06 69.46,77.53 v72.93,74.06
NRESET
  Top 0.406: CTX-DB.10 84.24,36 56.55,36 56.4,35.84 51.43,35.84 47.58,39.69 U$1.34
PWR+
  Bottom 0.406: 45.52,72.27 37.44,72.27 37.04,71.88 R7.2 35.83,71.02 35.62,71.23 R5.2 | PC+.1 48.9,75.53 48.01,75.53 45.52,73.03 45.52,72.27 | 45.52,72.27 47.9,69.89 48.9,69.89 PWR+.1
PWR+1
  Bottom 0.406: 54.81,76 62.89,76 63.29,76.4 R8.2 64.5,77.25 64.71,77.04 R6.2 | PC+1.1 51.44,72.75 52.32,72.75 54.81,75.24 54.81,76 | 54.81,76 52.43,78.38 51.44,78.38 PWR+1.1
PWR-
  Bottom 0.406: PWR-.1 PC-.1
PWR-1
  Bottom 0.406: PWR-1.1 PC-1.1
RST
  Top 0.406: W5100.5 59.89,13.34 59.89,13.47 58.96,14.4 50.62,14.4 49.62,15.4 42.15,15.4 41.03,14.29 U$1.17
  Bottom 0.406: W5100.5 60.96,14.4 61.09,14.4 62.43,15.74 62.43,49.24 67.94,54.76 W5500NIREN.6
RX0
  Top 0.406: U$1.30 47.58,29.53 47.9,29.21 UART0.3
RX1
  Bottom 0.406: UART1.3 79.16,27.09 79.16,24.94 65.36,11.13 47.64,11.13 U$1.22
RX2
  Bottom 0.406: SV5.3 32.95,81.03 32.95,84.28 33.57,84.9 39.88,84.9 SV1.4
RX3
  Bottom 0.406: SV3.3 67.38,67.24 67.38,63.99 66.76,63.37 60.45,63.37 SV6.4
RX_DBG
  Bottom 0.406: U$1.14 32.37,20.02 32.37,18.88 31.7,18.21 14.81,18.21 DBG.3
S2RX
  Bottom 0.406: SV1.8 30.13,81.88 30.13,78.04 26.35,74.26 SV4.10
S2RX1
  Bottom 0.406: SV6.8 70.2,66.39 70.2,70.23 73.98,74.01 SV2.10
S2TX
  Bottom 0.406: SV4.11 23.81,78.11 SV1.9
S2TX1
  Bottom 0.406: SV2.11 76.52,70.17 SV6.9
SCK1  (via drill 0.3 pad 0.61)
  Top 0.406: 64.97,24.89 71.64,18.21 73.61,18.21 | 64.97,24.89 48.02,24.89 47.58,24.45 U$1.28 | 64.97,24.89 64.97,25.68 v65.32,26.04 | CC4.SCLK 73.61,47.37 73.61,47.62 v73.44,47.79 | CC_X2.4 90.17,3.66 90.45,3.66 91.3,4.51 91.3,5.57 78.48,18.38 73.78,18.38 73.61,18.21 | 73.61,18.21 73.61,15.62 CC2.SCLK | v26.84,13.59 26.72,13.59 CC0.SCLK 23.43,13.59 15.09,5.25 15.09,4.5 14.25,3.66 13.97,3.66 CC_X0.4 | CC_X1.4 10.16,57.3 10.44,57.3 11.28,56.46 11.28,55.69 21.62,45.34 CC1.SCLK
  Bottom 0.406: CC_X4.4 83.97,58.42 83.97,58.14 83.13,57.3 82.34,57.3 73.44,48.4 v73.44,47.79 65.32,39.67 v65.32,26.04 | 40.44,24.45 31.55,15.56 28.8,15.56 v26.84,13.59 | 40.44,24.45 40.44,29.58 31.61,38.42 29.35,38.42 13.97,53.8 13.97,56.23 12.9,57.3 12.12,57.3 11.28,58.14 11.28,58.42 CC_X1.4 | 40.44,24.45 U$1.28
SCK2  (via drill 0.3 pad 0.61)
  Top 0.406: W5100.6 59.89,15.88 59.89,16.01 58.3,17.6 v54.65,17.6
  Bottom 0.406: v54.65,17.6 50.07,13.02 34.29,13.02 U$1.19 | W5500NIREN.10 62.87,52.48 60.96,50.58 W5100.6
SCK3
  Bottom 0.406: SV5.8 46.67,78.13 46.67,77.16 44.56,75.04 44.01,75.04 43,74.03 43,73.52 42.34,72.86 41.42,72.86 40.44,73.84 40.44,73.98 W1.6
SCK4
  Bottom 0.406: SV3.8 53.66,70.14 53.66,71.12 55.77,73.23 56.32,73.23 57.33,74.24 57.33,74.75 57.99,75.41 58.91,75.41 59.89,74.43 59.89,74.3 W2.6
SWCLK/TCK
  Top 0.406: U$1.10 31.79,30.75 46.82,30.75 47.09,30.48 83.25,30.48 84.52,29.21 CTX-DB.4
SWDIO/TMS
  Top 0.406: U$1.11 31.79,28.21 46.82,28.21 47.09,27.94 CTX-DB.2
SWO/TDO
  Top 0.406: U$1.8 28.6,35.27 28.6,34.12 29.5,33.22 74.87,33.22 75.06,33.02 83.12,33.02 85.66,30.48 CTX-DB.6
TDI
  Top 0.406: CTX-DB.8 85.66,31.75 85.66,32.26 82.49,35.44 57.58,35.44 57.4,35.27 48.19,35.27 47.72,35.75 31.62,35.75 U$1.9
TX0
  Top 0.406: U$1.31 47.58,32.07 47.9,31.75 UART0.2
TX1
  Bottom 0.406: UART1.2 78.1,28.57 78.1,26.17 66.33,14.4 65.56,14.4 64.77,13.61 64.77,13.04 63.41,11.69 47.64,11.69 47.58,11.75 U$1.23
TX2
  Top 0.406: SV5.4 37.78,81.28 37.78,84.04 38.62,84.87 42.44,84.87 SV1.3
TX3
  Top 0.406: SV3.4 62.55,66.99 62.55,64.24 61.71,63.4 57.89,63.4 SV6.3
TX_DBG
  Bottom 0.406: U$1.15 28.6,19.37 16.22,31.75 DBG.2
VCC  (via drill 0.3 pad 0.61)
  Top 0.406: CC_X0.1 21.57,5.08 24.08,7.59 CC0.VCC 26.72,7.59 26.72,7.42 26.83,7.3 C1.2 | 89.12,25.5 91.56,27.94 CTX-DB.1 | 89.12,25.5 v83.84,25.5 80.13,25.5 76.25,21.62 CC2.VCC 73.61,21.62 73.61,21.38 73.5,21.27 C3.2 | 89.12,25.5 89.12,9.79 92.71,6.2 CC_X2.1 | 45.73,54.72 43.86,52.85 43.86,46.76 44.47,46.15 46.68,46.15 47.59,45.24 47.59,41.7 46.84,40.96 36.96,40.96 34.5,38.5 28.12,38.5 27.94,38.68 C2.2 26.83,39.69 26.72,39.58 26.72,39.34 CC1.VCC 24.08,39.34 19.03,34.29 DBG.1 | U$1.40 45.73,54.72 | 45.73,54.72 49.69,50.75 49.69,50.48 C6.1 51.91,50.48 52.36,50.93 C5.1 57.15,52.09 58.08,53.02 C4.2 73.5,53.02 73.61,53.13 73.61,53.37 CC4.VCC 76.25,53.37 78.76,55.88 CC_X4.1 82.55,57.3 CC_X4.2 | UART1.1 UART0.1
  Bottom 0.406: 82.22,34.29 83.84,32.66 v83.84,25.5 | 82.22,34.29 82.55,34.62 CC_X4.1 | UART1.1 82.22,34.29 | 14.4,3.81 15.39,2.81 15.39,2.54 CC_X0.2 | 14.4,3.81 13.62,3.81 12.85,4.57 12.85,10.2 1.34,21.72 1.34,33.7 1.93,34.29 DBG.1 7.62,38.1 CC_X1.1 CC_X1.2 | 14.4,3.81 15.39,4.81 15.39,5.08 CC_X0.1 | CC_X2.2 CC_X2.1
VCC1
  Top 0.61: 32.07,68.36 32.7,67.73 39.95,67.73 41.11,68.9 R2.2 | 32.07,68.36 31.16,67.46 28.33,67.46 27.46,68.33 27.46,68.87 CC1101.VCC 24.61,68.87 23.75,68 4.19,68 SV4.20 | SJ1.2 32.07,68.36
  Bottom 0.61: R2.2 R3.2 | SV4.20 2.97,62.75 3.98,62.75 4.76,63.53 4.76,66.03 24.31,85.58 46.82,85.58 SV1.1
VCC2
  Top 0.61: 68.26,79.91 67.63,80.54 60.38,80.54 59.22,79.38 R1.2 | 68.26,79.91 69.17,80.81 72,80.81 72.87,79.94 72.87,79.41 CC3.VCC 75.72,79.41 76.58,80.27 96.14,80.27 SV2.20 | SJ2.2 68.26,79.91
  Bottom 0.61: R1.2 R4.2 | SV2.20 97.36,85.53 96.35,85.53 95.57,84.74 95.57,82.24 76.02,62.7 53.51,62.7 SV6.1
WIZ_CS  (via drill 0.3 pad 0.61)
  Top 0.406: v61.91,53.93 62.61,53.93 64.29,55.6 64.29,55.88 W5500NIREN.8 | W5100.3 58.42,8.94 51.57,2.1 35.05,2.1 U$1.20
  Bottom 0.406: v61.91,53.93 59.69,51.7 59.69,15.54 58.55,14.4 58.42,14.4 W5100.3
WIZ_CS1
  Top 0.406: W1.3 37.9,76.52 37.9,76.65 38.83,77.58 46.79,77.58 SV5.9
WIZ_CS2
  Top 0.406: W2.3 62.43,71.75 62.43,71.62 61.5,70.69 53.54,70.69 SV3.9
WIZ_RST
  Top 0.406: U$1.16 36.1,16.83 39.76,20.48 47.75,20.48 51.29,16.94 56.42,16.94 57.35,16.01 57.35,15.88 W5100.4
  Bottom 0.406: W5500NIREN.5 66.83,58.42 66.83,58.14 65.99,57.3 62.68,57.3 58.42,53.05 W5100.4
WIZ_RST1
  Bottom 0.406: SV5.5 39.05,78.13 37.9,76.97 37.9,75.98 36.96,75.04 36.83,75.04 W1.4
WIZ_RST2
  Bottom 0.406: SV3.5 61.28,70.14 62.43,71.3 62.43,72.3 63.37,73.23 63.5,73.23 W2.4

## Text on the board
tNames: CC-CUNO-IR | V1.0 www.neuby.de | TX2 | RX | 1 | 0 | 5V | RX1 | TX | G | VCC | 31 | 23 | AV- | VIN | AV+ | + | 5V | IR-IN | G | G | IR-IN | 5V | + | AV+ | AV- | VIN | 23 | 31 | VCC | G | TX | RX1 | 5V | 0 | 1 | RX | TX2 | V1.0 www.neuby.de | CC-CUNO-IR | +5V | VCC | AV+ | RST | GND | SCK | CS | MOSI | MISO | VCC | VCC | TX | NRST | TX | RX | RX | GND | GND | GND | VCC | GND | RST | SCK | MISO | 5V | NSS | GND | MO | 31 (PB12) | VIN
bNames: VCC | AV+ | 31 (PB12) | VIN
bValues: - | SW | PC | PC | SW | -